# Altium PCB BaseMod_V2.PcbDoc (part 1 of 2)
Units mm, origin at the board's own origin, x right, y up, seen from the top; angles counter-clockwise.
Board outline 100 x 94 mm, 2 copper layers (Top Layer, Bottom Layer), stack 1.069 mm thick; 165 components, 135 nets, 648 pads, 250 vias.
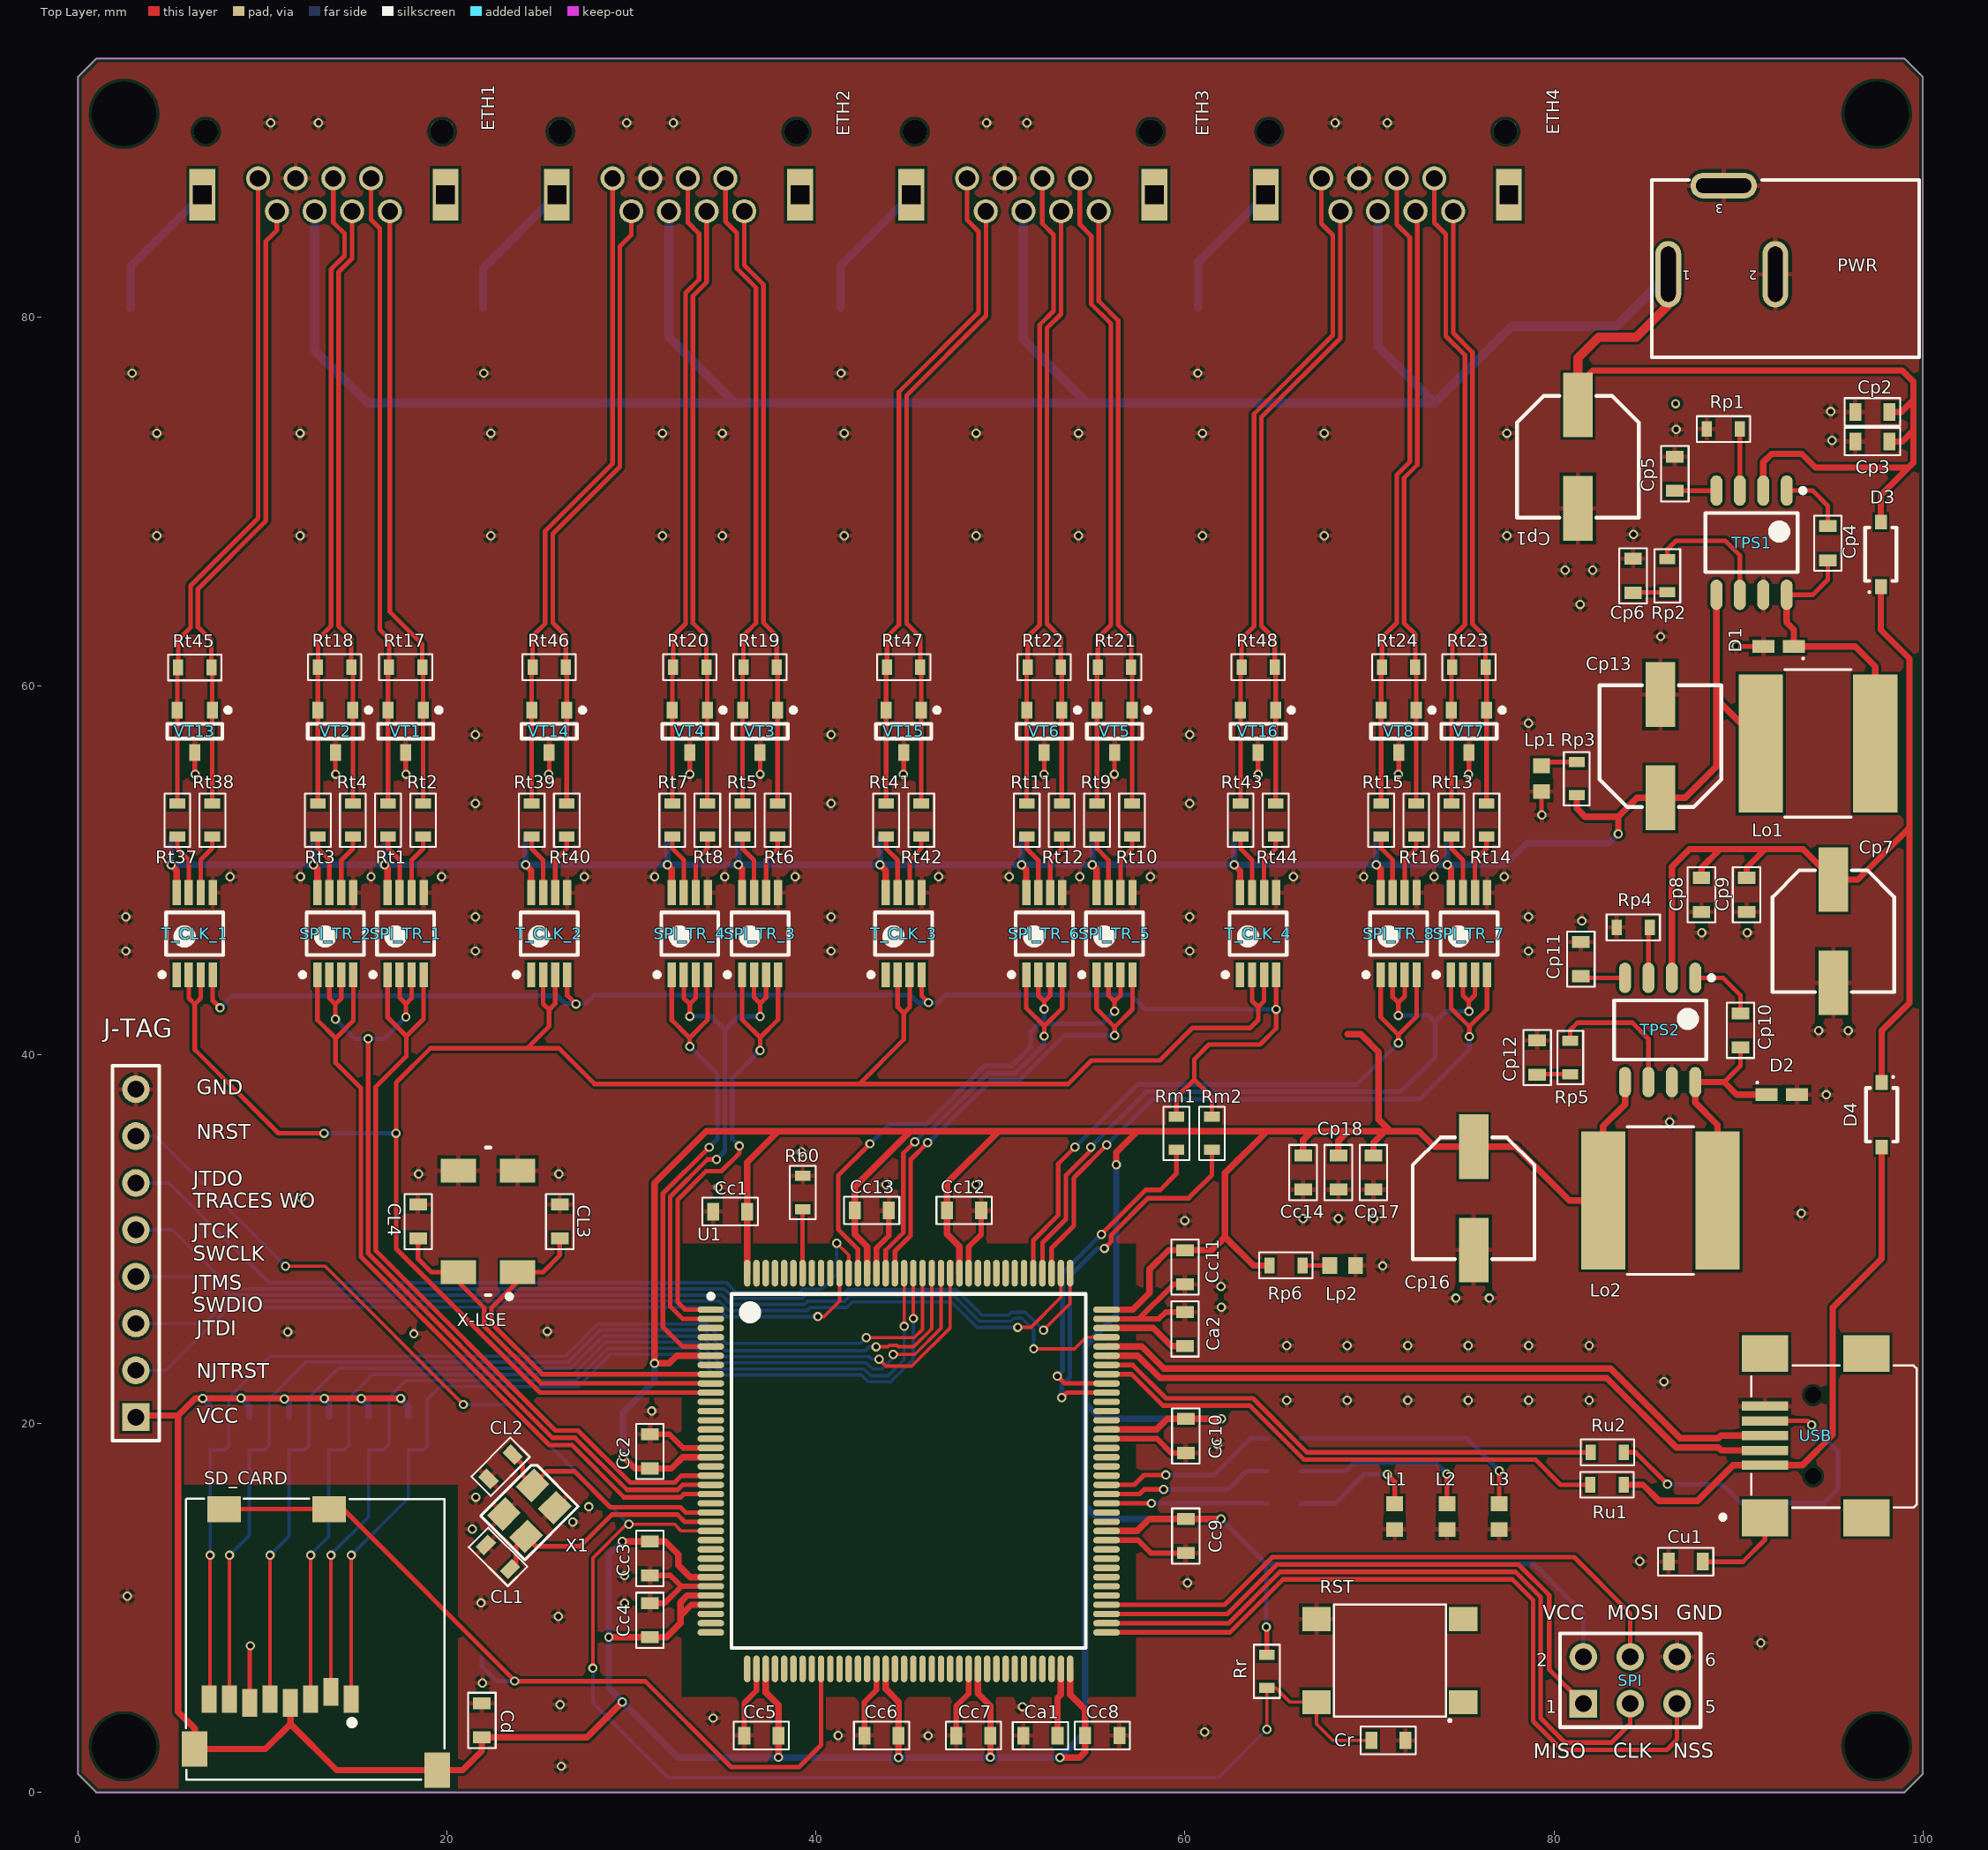
[diagram p0: Top Layer view]
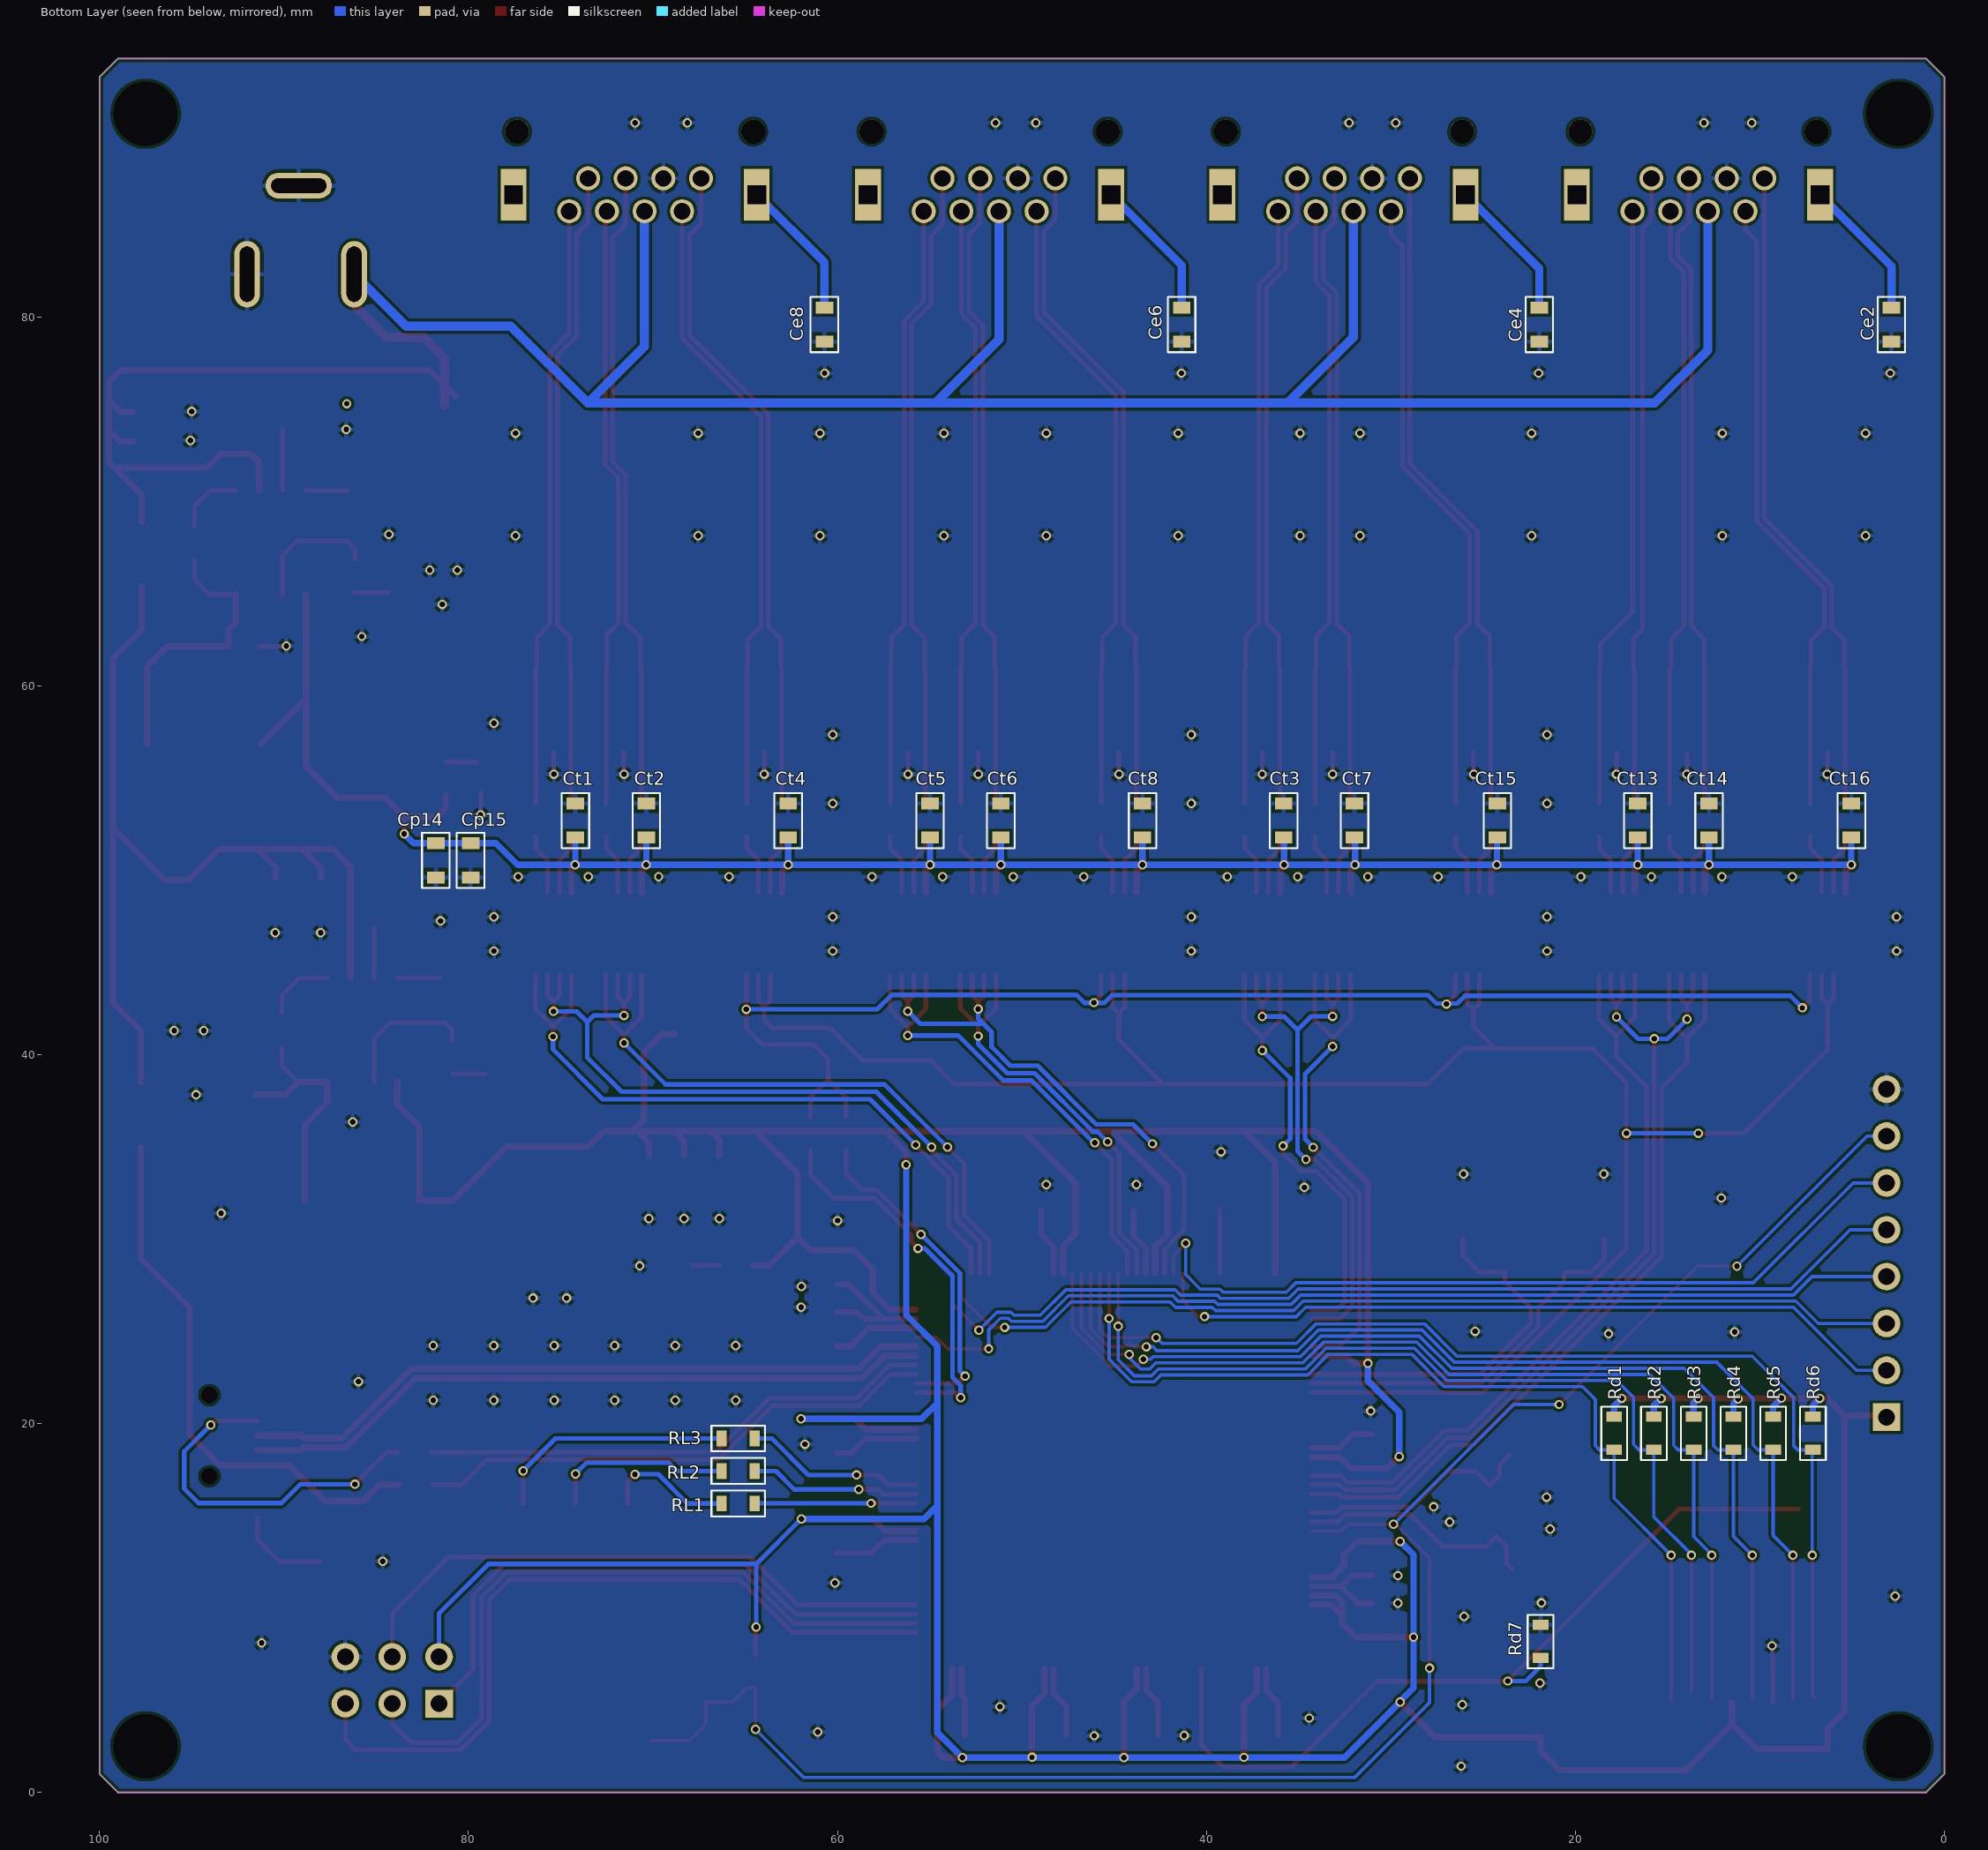
[diagram p1: Bottom Layer view, seen from below]

## Layer stack, top to bottom
Top Solder: solder mask 0.0102, Solder Resist, Dk 3.5
Top Layer: signal copper 0.0347
Dielectric 1: dielectric 1, FR-4, Dk 4.8
Bottom Layer: signal copper 0.0347
Bottom Solder: solder mask 0.0102, Solder Resist, Dk 3.5

## Board outline
0,1 0,93 1,94 99,94 100,93 100,1 99,0 1,0

## Design rules (kind name [scope] priority, off if disabled: settings)
Clearance [All] p1: gap=0.15
DiffPairsRouting [All] p1: maxlimit=0.5 minlimit=0.16 mostfreqgap=0.16 toplayer_minwidth=0.16 toplayer_maxwidth=1 toplayer_prefwidth=0.35 bottomlayer_minwidth=0.16 bottomlayer_maxwidth=1 bottomlayer_prefwidth=0.35 maxuncoupledlength=12.7
HoleSize [All] p1: absolutevalues=TRUE maxlimit=2308.557 minlimit=0.025 maxpercent=80.000 minpercent=20.000
HoleToHoleClearance [All] p1: gap=0.1 allowstackedmicrovias=TRUE
MinimumSolderMaskSliver [All] p1: minsoldermaskwidth=0.08
NetAntennae [All] p1: netantennaetolerance=10
PlaneClearance [All] p1: clearance=0.2
PlaneConnect [All] p1: planeconnectstyle=Relief reliefexpansion=0.3 reliefentries=4 reliefconductorwidth=0.25 reliefairgap=0.2
PolygonConnect [All] p1: connectstyle=Relief reliefconductorwidth=0.25 reliefentries=4 polygonreliefangle="90 Angle" airgapwidth=0.18
RoutingVias [All] p1: holewidth=0.3 width=0.5 viastyle="Through Hole" minholewidth=0.2 minwidth=0.4 maxholewidth=5 maxwidth=6
SilkToSilkClearance [All] p1: silktosilkclearance=0
SilkToSolderMaskClearance [IsPad] p1: minsilkscreentomaskgap=0.08 clearancetoexposedcopper=TRUE
SolderMaskExpansion [All] p1: expansion=0.102
Width J-TAG [InNet('NetJ-TAG_2') OR InNet('NetJ-TAG_3') OR InNet('NetJ-TAG_4') OR InNet('NetJ-TAG_5') OR InNet('NetJ-TAG_6') OR InNet('NetCr_2')] p1: maxlimit=0.4 minlimit=0.16 preferedwidth=0.18
Width SD_card [InNet('NetRd1_1')OR InNet('NetRd2_1')OR InNet('NetRd3_1')OR InNet('NetRd4_1')OR InNet('NetRd5_1')OR InNet('NetRd6_1')OR Innet('NetRd7_1')] p2: maxlimit=0.45 minlimit=0.16 preferedwidth=0.18
Width Power [InNet('V_CABLE') OR  InNet('VCC') OR InNet('VCC_RS') OR InNet('VCC_USB') OR InNet('NetCp7_1')] p3: maxlimit=0.5 minlimit=0.254 preferedwidth=0.35
Width [All] p4: maxlimit=0.45 minlimit=0.16 preferedwidth=0.25
21 further rules are at their usual default settings.

## Classes and differential pairs
component class USB: Cu1 Ru1 Ru2 USB
component class RS485_SPI_Recieve: Ct1 Ct2 Ct3 Ct4 Ct5 Ct6 Ct7 Ct8 Rt1 Rt2 Rt3 Rt4 Rt5 Rt6 Rt7 Rt8 Rt9 Rt10 Rt11 Rt12 Rt13 Rt14 Rt15 Rt16 Rt17 Rt18 Rt19 Rt20 Rt21 Rt22 Rt23 Rt24 SPI_TR_1 SPI_TR_2 SPI_TR_3 SPI_TR_4 SPI_TR_5 SPI_TR_6 SPI_TR_7 SPI_TR_8 VT1 VT2 VT3 VT4 VT5 VT6 VT7 VT8
component class RS485_Clock: Ct13 Ct14 Ct15 Ct16 Rt37 Rt38 Rt39 Rt40 Rt41 Rt42 Rt43 Rt44 Rt45 Rt46 Rt47 Rt48 T_CLK_1 T_CLK_2 T_CLK_3 T_CLK_4 VT13 VT14 VT15 VT16
component class programmer: J-TAG
component class Power: Cp1 Cp2 Cp3 Cp4 Cp5 Cp6 Cp7 Cp8 Cp9 Cp10 Cp11 Cp12 Cp13 Cp14 Cp15 Cp16 Cp17 Cp18 D1 D2 D3 D4 Lo1 Lo2 Lp1 Lp2 PWR Rp1 Rp2 Rp3 Rp4 Rp5 Rp6 TPS1 TPS2
component class MCU_Pins: CL3 CL4 Rm1 Rm2 U1 X-LSE
component class eth_conn: Ce2 Ce4 Ce6 Ce8 ETH1 ETH2 ETH3 ETH4
component class Core: Ca1 Ca2 Cc1 Cc2 Cc3 Cc4 Cc5 Cc6 Cc7 Cc8 Cc9 Cc10 Cc11 Cc12 Cc13 Cc14 CL1 CL2 Cr Rb0 Rr RST X1
component class AUX_conn: Cd L1 L2 L3 Rd1 Rd2 Rd3 Rd4 Rd5 Rd6 Rd7 RL1 RL2 RL3 SD_CARD SPI
differential pair D: +D_P -D_N

## Components (designator, comment, footprint, x,y, rotation, side; value= is the part's Value field where it differs from the comment)
Ca1 "X7R" CAP0603 52.17,3.077 r180 top
Ca2 "X7R" CAP0603 60.011,25.121 r90 top
Cc1 "Cap Semi" CAP0603 35.351,31.49 r0 top
Cc2 "Cap Semi" CAP0603 30.995,18.489 r270 top
Cc3 "Cap Semi" CAP0603 31.002,12.684 r90 top
Cc4 "Cap Semi" CAP0603 30.995,9.336 r270 top
Cc5 "Cap Semi" CAP0603 37.041,3.077 r0 top
Cc6 "Cap Semi" CAP0603 43.555,3.077 r0 top
Cc7 "Cap Semi" CAP0603 48.534,3.077 r0 top
Cc8 "Cap Semi" CAP0603 55.522,3.084 r180 top
Cc9 "Cap Semi" CAP0603 60.054,13.9 r90 top
Cc10 "Cap Semi" CAP0603 60.054,19.324 r90 top
Cc11 "Cap Semi" CAP0603 60.011,28.473 r90 top
Cc12 "Cap Semi" CAP0603 48.035,31.558 r180 top
Cc13 "Cap Semi" CAP0603 43.026,31.558 r180 top
Cc14 "X5R" CAP0603 66.408,33.605 r90 top
Cd "Cap Semi" CAP0603 21.889,3.908 r270 top
Ce2 "Cap Semi" CAP0603 2.873,79.575 r90 bottom
Ce4 "Cap Semi" CAP0603 21.96,79.575 r90 bottom
Ce6 "Cap Semi" CAP0603 41.344,79.575 r90 bottom
Ce8 "Cap Semi" CAP0603 60.707,79.575 r90 bottom
CL1 "Cap Semi" CAP0603 22.766,12.764 r315 top
CL2 "Cap Semi" CAP0603 22.909,17.652 r45 top
CL3 "Cap Semi" CAP0603 26.113,30.95 r270 top locked
CL4 "Cap Semi" CAP0603 18.438,30.95 r270 top locked
Cp1 "47uF" WCAP-ASLI_6.3x7.7 81.303,72.413 r90 top
Cp2 "Cap Semi" CAP0603 97.262,74.839 r0 top
Cp3 "Cap Semi" CAP0603 97.262,73.239 r0 top
Cp4 "Cap Semi" CAP0603 94.857,67.724 r90 top
Cp5 "Cap Semi" CAP0603 86.555,71.491 r270 top
Cp6 "Cap Semi" CAP0603 84.29,65.96 r270 top
Cp7 "47uF" WCAP-ASLI_6.3x7.7 95.152,46.69 r90 top
Cp8 "Cap Semi" CAP0603 88,48.658 r90 top
Cp9 "Cap Semi" CAP0603 90.45,48.658 r90 top
Cp10 "Cap Semi" CAP0603 90.122,41.312 r90 top
Cp11 "Cap Semi" CAP0603 81.459,45.177 r270 top
Cp12 "Cap Semi" CAP0603 79.095,39.841 r270 top
Cp13 "22uF" WCAP-ASNP_6.3x5.5 85.773,56.722 r270 top
Cp14 "Cap Semi" CAP0603 81.771,50.531 r90 bottom
Cp15 "Cap Semi" CAP0603 79.888,50.531 r90 bottom
Cp16 "22uF" WCAP-ASNP_6.3x5.5 75.65,32.207 r90 top
Cp17 "Cap Semi" CAP0603 70.222,33.605 r90 top
Cp18 "Cap Semi" CAP0603 68.324,33.605 r90 top
Cr "Cap Semi" CAP0603 71.027,2.82 r180 top
Ct1 "Cap Semi" CAP0603 74.21,52.688 r270 bottom
Ct2 "Cap Semi" CAP0603 70.365,52.688 r270 bottom
Ct3 "Cap Semi" CAP0603 35.819,52.688 r270 bottom
Ct4 "Cap Semi" CAP0603 62.676,52.688 r270 bottom
Ct5 "Cap Semi" CAP0603 54.989,52.688 r270 bottom
Ct6 "Cap Semi" CAP0603 51.149,52.688 r270 bottom
Ct7 "Cap Semi" CAP0603 31.977,52.688 r270 bottom
Ct8 "Cap Semi" CAP0603 43.47,52.688 r270 bottom
Ct13 "Cap Semi" CAP0603 16.624,52.688 r270 bottom
Ct14 "Cap Semi" CAP0603 12.765,52.688 r270 bottom
Ct15 "Cap Semi" CAP0603 24.236,52.688 r270 bottom
Ct16 "Cap Semi" CAP0603 5.046,52.688 r270 bottom
Cu1 "Cap Semi" CAP0603 87.146,12.509 r180 top
D1 "schottky Diode" DIOM1709X08N 92.184,62.123 r180 top
D2 "schottky Diode" DIOM1709X08N 92.349,37.837 r0 top
D3 "schottky_diode" MBR180S1 97.723,67.123 r90 top
D4 "schottky_diode" MBR180S1 97.767,36.739 r270 top
ETH1 "RJ48" "TE modular Jack RJ45" 13.334,86.612 r180 top locked
ETH2 "RJ48" "TE modular Jack RJ45" 32.546,86.612 r180 top locked
ETH3 "RJ48" "TE modular Jack RJ45" 51.759,86.612 r180 top locked
ETH4 "RJ48" "TE modular Jack RJ45" 70.971,86.612 r180 top locked
J-TAG "Header 8" HDR1X8 3.137,20.342 r90 top
L1 "LED2" 1608[0603] 71.374,14.955 r270 top
L2 "LED2" 1608[0603] 74.206,14.955 r270 top
L3 "LED2" 1608[0603] 77.037,14.955 r270 top
Lo1 "74404084150" WE-LQS_8040 94.321,56.87 r180 top
Lo2 "74404084150" WE-LQS_8040 85.773,32.088 r180 top
Lp1 "LED_1.6x0.8mm" 1608[0603] 79.325,54.957 r270 top
Lp2 "LED_1.6x0.8mm" 1608[0603] 68.553,28.568 r0 top
PWR "694108301002" 694108301002 99.802,82.31 r180 top
Rb0 "Res3" RES0603 39.281,32.524 r90 top
Rd1 "Res3" RES0603 17.905,19.472 r90 bottom
Rd2 "Res3" RES0603 15.75,19.472 r90 bottom
Rd3 "Res3" RES0603 13.596,19.472 r90 bottom
Rd4 "Res3" RES0603 11.441,19.472 r90 bottom
Rd5 "Res3" RES0603 9.287,19.472 r90 bottom
Rd6 "Res3" RES0603 7.132,19.472 r90 bottom
Rd7 "Res3" RES0603 21.889,8.184 r270 bottom
RL1 "Res3" RES0603 65.384,15.662 r0 bottom
RL2 "Res3" RES0603 65.384,17.423 r0 bottom
RL3 "Res3" RES0603 65.384,19.185 r0 bottom
Rm1 "Res3" RES0603 59.537,35.731 r90 top
Rm2 "Res3" RES0603 61.461,35.731 r90 top
Rp1 "Res3" RES0603 89.191,73.915 r0 top
Rp2 "Res3" RES0603 86.148,65.96 r90 top
Rp3 "Res3" RES0603 81.244,54.957 r270 top
Rp4 "Res3" RES0603 84.301,46.897 r0 top
Rp5 "Res3" RES0603 80.888,39.841 r90 top
Rp6 "Res3" RES0603 65.482,28.568 r180 top
Rr "Res3" RES0603 64.444,6.561 r90 top
RST "430152043826" 4301x20438x6 71.11,7.146 r180 top
Rt1 "p-p" RES0603 16.812,52.714 r270 top locked
Rt2 "p-p" RES0603 18.712,52.714 r270 top locked
Rt3 "p-p" RES0603 13.004,52.714 r270 top locked
Rt4 "p-p" RES0603 14.904,52.714 r270 top locked
Rt5 "p-p" RES0603 36.024,52.714 r270 top locked
Rt6 "p-p" RES0603 37.924,52.714 r270 top locked
Rt7 "p-p" RES0603 32.216,52.714 r270 top locked
Rt8 "p-p" RES0603 34.116,52.714 r270 top locked
Rt9 "p-p" RES0603 55.237,52.714 r270 top locked
Rt10 "p-p" RES0603 57.137,52.714 r270 top locked
Rt11 "p-p" RES0603 51.429,52.714 r270 top locked
Rt12 "p-p" RES0603 53.329,52.714 r270 top locked
Rt13 "p-p" RES0603 74.449,52.714 r270 top locked
Rt14 "p-p" RES0603 76.349,52.714 r270 top locked
Rt15 "p-p" RES0603 70.641,52.714 r270 top locked
Rt16 "p-p" RES0603 72.541,52.714 r270 top locked
Rt17 "pp" RES0603 17.762,60.999 r180 top locked
Rt18 "pp" RES0603 13.914,60.999 r180 top locked
Rt19 "pp" RES0603 36.974,60.999 r180 top locked
Rt20 "pp" RES0603 33.164,60.999 r180 top locked
Rt21 "pp" RES0603 56.187,60.999 r180 top locked
Rt22 "pp" RES0603 52.377,60.999 r180 top locked
Rt23 "pp" RES0603 75.399,60.999 r180 top locked
Rt24 "pp" RES0603 71.589,60.999 r180 top locked
Rt37 "p-p" RES0603 5.382,52.71 r90 top locked
Rt38 "p-p" RES0603 7.282,52.71 r90 top locked
Rt39 "p-p" RES0603 24.594,52.71 r90 top locked
Rt40 "p-p" RES0603 26.494,52.71 r90 top locked
Rt41 "p-p" RES0603 43.807,52.71 r90 top locked
Rt42 "p-p" RES0603 45.707,52.71 r90 top locked
Rt43 "p-p" RES0603 63.019,52.71 r90 top locked
Rt44 "p-p" RES0603 64.919,52.71 r90 top locked
Rt45 "p-p" RES0603 6.332,60.985 r180 top locked
Rt46 "p-p" RES0603 25.544,60.999 r180 top locked
Rt47 "p-p" RES0603 44.757,60.999 r180 top locked
Rt48 "p-p" RES0603 63.969,60.999 r180 top locked
Ru1 "Res3" RES0603 82.881,16.682 r0 top
Ru2 "Res3" RES0603 82.897,18.437 r0 top
SD_CARD "693071010811" 693071010811 12.9,8.282 r180 top locked
SPI "Header 3X2" HDR2X3 81.598,4.812 r0 top
SPI_TR_1 "sn65hvd7x" SOP127P600-8N 17.762,46.553 r90 top locked
SPI_TR_2 "sn65hvd7x" SOP127P600-8N 13.952,46.553 r90 top locked
SPI_TR_3 "sn65hvd7x" SOP127P600-8N 36.974,46.553 r90 top locked
SPI_TR_4 "sn65hvd7x" SOP127P600-8N 33.164,46.553 r90 top locked
SPI_TR_5 "sn65hvd7x" SOP127P600-8N 56.187,46.553 r90 top locked
SPI_TR_6 "sn65hvd7x" SOP127P600-8N 52.377,46.553 r90 top locked
SPI_TR_7 "sn65hvd7x" SOP127P600-8N 75.399,46.553 r90 top locked
SPI_TR_8 "sn65hvd7x" SOP127P600-8N 71.589,46.553 r90 top locked
T_CLK_1 "sn65hvd7x" SOP127P600-8N 6.332,46.553 r90 top locked
T_CLK_2 "sn65hvd7x" SOP127P600-8N 25.544,46.553 r90 top locked
T_CLK_3 "sn65hvd7x" SOP127P600-8N 44.757,46.553 r90 top locked
T_CLK_4 "sn65hvd7x" SOP127P600-8N 63.969,46.553 r90 top locked
TPS1 "TPS5403" SOIC127P600X175-8M 90.715,67.754 r270 top
TPS2 "TPS5403" SOIC127P600X175-8M 85.76,41.336 r270 top
U1 "STM32F767ZIT" TSQFP50P2200X2200X160-144N 45.029,17.424 r0 top locked
USB "65100516121" 65100516121 94.047,19.341 r90 top
VT1 "CDSOT23-SM712" SOT190P230X117-3N 17.762,57.525 r270 top
VT2 "CDSOT23-SM712" SOT190P230X117-3N 13.952,57.525 r270 top
VT3 "CDSOT23-SM712" SOT190P230X117-3N 36.974,57.525 r270 top locked
VT4 "CDSOT23-SM712" SOT190P230X117-3N 33.164,57.525 r270 top locked
VT5 "CDSOT23-SM712" SOT190P230X117-3N 56.187,57.525 r270 top locked
VT6 "CDSOT23-SM712" SOT190P230X117-3N 52.377,57.525 r270 top locked
VT7 "CDSOT23-SM712" SOT190P230X117-3N 75.399,57.525 r270 top locked
VT8 "CDSOT23-SM712" SOT190P230X117-3N 71.589,57.525 r270 top locked
VT13 "CDSOT23-SM712" SOT190P230X117-3N 6.332,57.525 r270 top
VT14 "CDSOT23-SM712" SOT190P230X117-3N 25.544,57.525 r270 top locked
VT15 "CDSOT23-SM712" SOT190P230X117-3N 44.757,57.525 r270 top locked
VT16 "CDSOT23-SM712" SOT190P230X117-3N 63.969,57.525 r270 top locked
X1 "Resonator" ABM8G 24.468,15.26 r225 top
X-LSE "Resonator" SOJ550P380X250-4M 22.226,30.959 r180 top locked

## Footprints (in the part's own frame and the unit in brackets; to place one, negate y for a bottom-side part, rotate by r counter-clockwise, add the part's x,y. Pads: shape width x height; smd on the part's side, far side on the other; paste and mask are expansions set on the pad)
1608[0603] [mm] "Chip Capacitor, Body 1.6x0.8mm, IPC High Density"
  rect 0.8x0.9 smd: 1(-0.7,0) 2(0.7,0)
  body extent -0.87,-0.48 0.87,0.48, height 1.3
4301x20438x6 [mm] "6*6mm vertical type, SMD, height 4.3mm, black actuator, 160gf, T&R"
  rect 1.55x1.3 smd: 1(-3.975,2.25) 2(-3.975,-2.25) 3(3.975,2.25) 4(3.975,-2.25)
  silkscreen extent -3.29,-3.04 3.04,3.29, body extent -4.5,-3.1 4.5,3.1, height 4.29
65100516121 [mm] "5 pins"
  rect 0.5x2.5 smd: 1(-1.6,2.6) 2(-0.8,2.6) 3(0,2.6) 4(0.8,2.6) 5(1.6,2.6)
  rect 2x2.5 smd: Shell(-4.45,-2.9) Shell(-4.45,2.6) Shell(4.45,-2.9) Shell(4.45,2.6)
  round 0.7 hole 0.9 unplated: ""(-2.2,0) ""(2.2,0)
  silkscreen extent -4.54,-5.63 3.8,5.01, body extent -4.8,-5.9 4.8,3.35, height 3.9
693071010811 [mm] "WR-CRD Micro SD_Push and Push_Card Detection_8 pins"
  rect 0.8x1.5 smd: 1(-1.915,3.225) 2(-0.815,2.825) 3(0.285,3.225) 4(1.385,3.425) 5(2.485,3.225) 6(3.585,3.425) 7(4.685,3.225) 8(5.785,3.225)
  rect 1.4x1.9 smd: 9(-6.575,7.075) 9(6.575,5.925)
  rect 1.8x1.4 smd: 10(-0.715,-7.075) 10(4.975,-7.075)
  silkscreen extent -6.98,-7.65 7.05,7.59, body extent -6.97,-7.63 7.03,7.58, height 1.84
694108301002 [mm] "WR-DC_DC Power Jack_Right Angled_THT Center Pin ?2.5_Plug ID ?2.05_Plug OD ?5.5"
  oval 1.4x3.6 hole 0.8 slot 3 at 90 deg: 1(13.6,0) 2(7.8,0)
  oval 3.6x1.4 hole 0.8 slot 3 at 0 deg: 3(10.6,-4.8)
  silkscreen extent 0,-5.1 14.5,4.5, body extent 0,-4.95 14.5,4.55, height 10.85
ABM8G [mm] "resonator"
  rect 1.4x1.2 smd: 1(-1.1,-0.85) 2(1.1,-0.85) 3(1.1,0.85) 4(-1.1,0.85)
  silkscreen extent -2.05,-1.68 2.05,1.7, body extent -1.62,-1.2 1.63,1.3, height 1
CAP0603 [mm]
  rect 0.65x0.95 smd: 1(-0.925,0) 2(0.925,0)
  silkscreen extent -1.5,-0.74 1.5,0.75, body extent -0.8,-0.4 0.8,0.4, height 0.2
DIOM1709X08N [mm] "Molded Diode, 2-Leads, Body 1.70x0.90mm, IPC Medium Density"
  rect 1.2x0.7 smd: 1(-0.825,0) 2(0.825,0)
  silkscreen extent -1.37,0.6 -1.28,0.7, body extent -0.9,-0.5 0.9,0.5, height 0.85
HDR1X8 [mm] "Connector; Header; 8 Position"
  rect 1.5x1.5 hole 0.9: 1(0,0)
  round 1.5 hole 0.9: 2(2.54,0) 3(5.08,0) 4(7.62,0) 5(10.16,0) 6(12.7,0) 7(15.24,0) 8(17.78,0)
  silkscreen extent -1.27,-1.27 19.05,1.27
HDR2X3 [mm] "Connector; Header; 3x2 Position"
  rect 1.5x1.5 hole 0.9: 1(0,0)
  round 1.5 hole 0.9: 2(0,2.54) 3(2.54,0) 4(2.54,2.54) 5(5.08,0) 6(5.08,2.54)
  silkscreen extent -1.27,-1.27 6.35,3.81
MBR180S1 [mm] "SODFL, 2-Leads, Body 1.55x3.70mm, IPC Medium Density"
  rect 0.8x0.65 smd: 1(-1.75,0) 2(1.75,0)
  silkscreen extent -2.1,-0.85 1.45,0.85, body extent -1.42,-0.85 1.43,0.85, height 1.35
RES0603 [mm]
  rect 0.55x0.85 smd: 1(-0.9,0) 2(0.9,0)
  silkscreen extent -1.45,-0.7 1.45,0.7, body extent -0.8,-0.4 0.8,0.4, height 0.2
SOIC127P600X175-8M [mm] "SOIC, 8-Leads, Body 4.90x3.90mm, Pitch 1.27mm, IPC Low Density"
  oval 1.65x0.65 smd: 1(-2.825,1.905) 2(-2.825,0.635) 3(-2.825,-0.635) 4(-2.825,-1.905) 5(2.825,-1.905) 6(2.825,-0.635) 7(2.825,0.635) 8(2.825,1.905)
  silkscreen extent -2.95,-2.5 1.6,2.91, body extent -2,-2.5 2,2.5, height 1.75
SOJ550P380X250-4M [mm] "SOJ, 4-Leads, Body 8.00x3.75mm, Pitch 5.50mm, IPC Low Density"
  rect 1.9x1.3 smd: 1(-1.6,2.75) 2(-1.6,-2.75) 3(1.6,2.75) 4(1.6,-2.75)
  silkscreen extent -1.28,-4 0.13,4.2, body extent -1.9,-4 1.9,4, height 2.5
SOP127P600-8N [mm]
  rect 1.35x0.45 smd: 1(-2.225,0.975) 2(-2.225,0.325) 3(-2.225,-0.325) 4(-2.225,-0.975) 5(2.225,-0.975) 6(2.225,-0.325) 7(2.225,0.325) 8(2.225,0.975)
  silkscreen extent -2.35,-1.55 1.15,1.9, body extent -1.55,-1.55 1.55,1.55, height 1.1
SOT190P230X117-3N [mm] "SOT223, 3-Leads, Body 2.90x2.30mm (avg), Pitch 1.90mm, IPC Medium Density"
  rect 0.9x0.6 smd: 1(-1.15,0.95) 2(-1.15,-0.95) 3(1.15,0)
  silkscreen extent -1.27,-1.5 0.4,1.93, body extent -0.7,-1.5 0.7,1.5, height 1.17
"TE modular Jack RJ45" [mm] "ethernet connector"
  round 1.3 hole 0.9: 1(3.57,-0.89) 2(2.55,0.89) 3(1.53,-0.89) 4(0.51,0.89) 5(-0.51,-0.89) 6(-1.53,0.89) 7(-2.55,-0.89) 8(-3.57,0.89)
  rect 1.4x2.8 hole 1 square: 9(-6.59,0) 9(6.59,0)
  round 1.3 hole 1.31 unplated: ""(-6.4,-3.43) ""(6.4,-3.43)
  body extent -8.1,-6 8.1,9, height 11.3
TSQFP50P2200X2200X160-144N [mm] "TSQFP, 144-Leads, Body 20.00x20.00mm, Pitch 0.50mm, IPC Medium Density"
  oval 1.45x0.35 smd: 1(-10.725,8.75) 2(-10.725,8.25) 3(-10.725,7.75) 4(-10.725,7.25) 5(-10.725,6.75) 6(-10.725,6.25) 7(-10.725,5.75) 8(-10.725,5.25) 9(-10.725,4.75) 10(-10.725,4.25) 11(-10.725,3.75) 12(-10.725,3.25) 13(-10.725,2.75) 14(-10.725,2.25) 15(-10.725,1.75) 16(-10.725,1.25) 17(-10.725,0.75) 18(-10.725,0.25) 19(-10.725,-0.25) 20(-10.725,-0.75) 21(-10.725,-1.25) 22(-10.725,-1.75) 23(-10.725,-2.25) 24(-10.725,-2.75) 25(-10.725,-3.25) 26(-10.725,-3.75) 27(-10.725,-4.25) 28(-10.725,-4.75) 29(-10.725,-5.25) 30(-10.725,-5.75) 31(-10.725,-6.25) 32(-10.725,-6.75) 33(-10.725,-7.25) 34(-10.725,-7.75) 35(-10.725,-8.25) 36(-10.725,-8.75) 73(10.725,-8.75) 74(10.725,-8.25) 75(10.725,-7.75) 76(10.725,-7.25) 77(10.725,-6.75) 78(10.725,-6.25) 79(10.725,-5.75) 80(10.725,-5.25) 81(10.725,-4.75) 82(10.725,-4.25) 83(10.725,-3.75) 84(10.725,-3.25) 85(10.725,-2.75) 86(10.725,-2.25) 87(10.725,-1.75) 88(10.725,-1.25) 89(10.725,-0.75) 90(10.725,-0.25) 91(10.725,0.25) 92(10.725,0.75) 93(10.725,1.25) 94(10.725,1.75) 95(10.725,2.25) 96(10.725,2.75) 97(10.725,3.25) 98(10.725,3.75) 99(10.725,4.25) 100(10.725,4.75) 101(10.725,5.25) 102(10.725,5.75) 103(10.725,6.25) 104(10.725,6.75) 105(10.725,7.25) 106(10.725,7.75) 107(10.725,8.25) 108(10.725,8.75)
  oval 0.35x1.45 smd: 37(-8.75,-10.725) 38(-8.25,-10.725) 39(-7.75,-10.725) 40(-7.25,-10.725) 41(-6.75,-10.725) 42(-6.25,-10.725) 43(-5.75,-10.725) 44(-5.25,-10.725) 45(-4.75,-10.725) 46(-4.25,-10.725) 47(-3.75,-10.725) 48(-3.25,-10.725) 49(-2.75,-10.725) 50(-2.25,-10.725) 51(-1.75,-10.725) 52(-1.25,-10.725) 53(-0.75,-10.725) 54(-0.25,-10.725) 55(0.25,-10.725) 56(0.75,-10.725) 57(1.25,-10.725) 58(1.75,-10.725) 59(2.25,-10.725) 60(2.75,-10.725) 61(3.25,-10.725) 62(3.75,-10.725) 63(4.25,-10.725) 64(4.75,-10.725) 65(5.25,-10.725) 66(5.75,-10.725) 67(6.25,-10.725) 68(6.75,-10.725) 69(7.25,-10.725) 70(7.75,-10.725) 71(8.25,-10.725) 72(8.75,-10.725) 109(8.75,10.725) 110(8.25,10.725) 111(7.75,10.725) 112(7.25,10.725) 113(6.75,10.725) 114(6.25,10.725) 115(5.75,10.725) 116(5.25,10.725) 117(4.75,10.725) 118(4.25,10.725) 119(3.75,10.725) 120(3.25,10.725) 121(2.75,10.725) 122(2.25,10.725) 123(1.75,10.725) 124(1.25,10.725) 125(0.75,10.725) 126(0.25,10.725) 127(-0.25,10.725) 128(-0.75,10.725) 129(-1.25,10.725) 130(-1.75,10.725) 131(-2.25,10.725) 132(-2.75,10.725) 133(-3.25,10.725) 134(-3.75,10.725) 135(-4.25,10.725) 136(-4.75,10.725) 137(-5.25,10.725) 138(-5.75,10.725) 139(-6.25,10.725) 140(-6.75,10.725) 141(-7.25,10.725) 142(-7.75,10.725) 143(-8.25,10.725) 144(-8.75,10.725)
  silkscreen extent -10.85,-9.6 9.6,9.6, body extent -10,-10 10,10, height 1.6
WCAP-ASLI_6.3x7.7 [mm] "Polarized capacitors, Aluminum Electrolytic Capacitors, 2-Leads, Body 6.3x7.7x2.2"
  rect 3.5x1.6 smd: 1(2.8,0) 2(-2.8,0)
  silkscreen extent -3.3,-3.3 3.3,3.3, body extent -3.65,-3.3 3.65,3.3, height 7.7
WCAP-ASNP_6.3x5.5 [mm] "Unpolarized capacitors, Aluminum Electrolytic Capacitors, 2-Leads, Body 6.3x5.5x2.2"
  rect 3.5x1.6 smd: 1(-2.8,0) 2(2.8,0)
  silkscreen extent -3.3,-3.3 3.3,3.3, body extent -3.65,-3.3 3.65,3.3, height 5.5
WE-LQS_8040 [mm] "SMD Power Inductor, 2-Leads, body 8.0x8.0mm"
  rect 2.4x7.5 smd: 1(-3.1,0) 2(3.1,0)
  silkscreen extent -1.8,-4 1.8,4, body extent -4,-4 4,4, height 4.25

## Part data
Ca1 Ca2 Cc14: library part "Cap Semi", "Capacitor (Semiconductor SIM Model)"
Cc1 Cc2 Cc3 Cc4 Cc5 Cc6 Cc7 Cc8 Cc9 Cc10 Cc11 Cc12 Cc13 Cd Ce2 Ce4 Ce6 Ce8 CL1 CL2 CL3 CL4 Cp2 Cp3 Cp4 Cp5 Cp6 Cp8 Cp9 Cp10 Cp11 Cp12 Cp14 Cp15 Cp17 Cp18 Cr Ct1 Ct2 Ct3 Ct4 Ct5 Ct6 Ct7 Ct8 Ct13 Ct14 Ct15 Ct16 Cu1: "Capacitor (Semiconductor SIM Model)"
Cp1 Cp7: library part "WCAP-ASLI, 865080645012", "WCAP-ASLI Aluminum Electrolytic Capacitors, 47uF"
Cp13 Cp16: library part "WCAP-ASNP, 865250543005", "WCAP-ASNP Aluminum Electrolytic Capacitors, 22uF"
D1 D2: library part SMD_schottky_CDBU0130L
D3 D4: library part "MRB180S1 schottky"
ETH1 ETH2 ETH3 ETH4: library part "Ethernet Jack"
J-TAG: "Header, 8-Pin"
L1 L2 L3: "Typical RED, GREEN, YELLOW, AMBER GaAs LED"
Lo1 Lo2: "WE-LQS SMD Power Inductor, size 8040, 15 uH"
PWR: "WR-DC DC Power Jack Right Angled(6.4)"
Rb0 Rd1 Rd2 Rd3 Rd4 Rd5 Rd6 Rd7 RL1 RL2 RL3 Rm1 Rm2 Rp1 Rp2 Rp3 Rp4 Rp5 Rp6 Rr Ru1 Ru2: "Resistor"
RST: library part "WS-TASV, 430152043826", "WS-TASV 6x6 mm SMD"
Rt1 Rt2 Rt3 Rt4 Rt5 Rt6 Rt7 Rt8 Rt9 Rt10 Rt11 Rt12 Rt13 Rt14 Rt15 Rt16 Rt17 Rt18 Rt19 Rt20 Rt21 Rt22 Rt23 Rt24 Rt37 Rt38 Rt39 Rt40 Rt41 Rt42 Rt43 Rt44 Rt45 Rt46 Rt47 Rt48: library part Res3, "Resistor"
SD_CARD: "WR-CRD Micro SD Card Connector Push & Push - 8 pins"
SPI: "Header, 3-Pin, Dual row"
TPS1 TPS2: "switching power-3.3V"
USB: "WR-COM Mini USB 2.0 Type B SMT Horizontal 5 Contacts"
X1 X-LSE: library part ABM8G-MHz

## Free pads (board coordinates)
  round 0 hole 3.5 unplated: 1(97.5,2.5) 2(2.5,2.5) 3(2.5,91) 4(97.5,91)

## Via types
v1: diameter 0.5, hole 0.3, Top Layer to Bottom Layer, tented both sides, 250 vias

## Nets (pads, with @x,y where several pads share a name; then routed paths per layer and width w, separated by ;. In a path a pad name is that pad's centre, name@x,y a point inside that pad or via, vN(x,y) a via of type N, cw(c..) or ccw(c..) an arc to the next point about the centre after c; other vN are vias at no path point)
D_N: U1.103 USB.2 | length 37.8
  Top Layer w0.35: U1.103@55.754,23.674 57.442,23.674 58.652,22.464 82.865,22.464 86.637,18.692 88.917,18.692 89.068,18.541 USB.2@91.447,18.541
D_P: U1.104 USB.3 | length 37.8
  Top Layer w0.35: U1.104@55.754,24.174 57.663,24.174 58.863,22.974 83.076,22.974 86.849,19.201 88.919,19.201 89.059,19.341 USB.3@91.447,19.341
GND: Ca1.2 Ca2.2 Cc1.1 Cc2.1 Cc3.1 Cc4.1 Cc5.1 Cc6.1 Cc7.1 Cc8.1 Cc9.1 Cc10.1 Cc11.1 Cc12.1 Cc13.1 Cc14.1 Cd.1 Ce2.1 Ce4.1 Ce6.1 Ce8.1 CL1.1 CL2.1 CL3.1 CL4.1 Cp1.2 Cp2.1 Cp3.1 Cp5.1 Cp6.1 Cp7.2 Cp8.1 Cp9.1 Cp11.1 Cp12.1 Cp13.1 Cp14.1 Cp15.1 Cp16.1 Cp17.1 Cp18.1 Cr.1 Ct1.1 Ct2.1 Ct3.1 Ct4.1 Ct5.1 Ct6.1 Ct7.1 Ct8.1 Ct13.1 Ct14.1 Ct15.1 Ct16.1 Cu1.2 D1.2 D2.2 ETH1.3 ETH2.3 ETH3.3 ETH4.3 J-TAG.8 L1.2 L2.2 L3.2 Lp1.2 Lp2.2 PWR.2 PWR.3 Rb0.2 Rd7.1 Rp1.1 Rp4.1 RST.4 SD_CARD.6 SPI.6 SPI_TR_1.5 SPI_TR_2.5 SPI_TR_3.5 SPI_TR_4.5 SPI_TR_5.5 SPI_TR_6.5 SPI_TR_7.5 SPI_TR_8.5 T_CLK_1.5 T_CLK_2.5 T_CLK_3.5 T_CLK_4.5 TPS1.7 TPS2.7 U1.16 U1.31 U1.38 U1.51 U1.61 U1.83 U1.94 U1.107 U1.120 U1.130 USB.5 VT1.3 VT2.3 VT3.3 VT4.3 VT5.3 VT6.3 VT7.3 VT8.3 VT13.3 VT14.3 VT15.3 VT16.3 X1.2 X1.4 X-LSE.2 X-LSE.4 | length 64.9
  Top Layer w0.25: v1@6.332,55.221 VT13.3@6.332,56.375 ; SD_CARD.6@9.315,4.857 v1@9.315,7.921 ; v1@13.952,55.218 VT2.3@13.952,56.375 ; v1@17.762,55.216 VT1.3@17.762,56.375 ; v1@25.544,55.229 VT14.3@25.544,56.375 ; v1@33.164,55.206 VT4.3@33.164,56.375 ; v1@36.974,55.205 VT3.3@36.974,56.375 ; v1@44.757,55.213 VT15.3@44.757,56.375 ; v1@52.377,55.21 VT6.3@52.377,56.375 ; v1@56.187,55.208 VT5.3@56.187,56.375 ; v1@63.969,55.204 VT16.3@63.969,56.375 ; v1@71.589,55.213 VT8.3@71.589,56.375 ; v1@75.399,55.221 VT7.3@75.399,56.375 ; v1@79.325,53.012 Lp1.2@79.325,54.257 ; v1@89.907,62.123 D1.2@91.359,62.123
  Top Layer w0.3: Cc4.1@30.995,10.261 31.789,10.261 32.702,11.174 ; Cc2.1@30.995,19.414 32.068,19.414 32.808,18.674 U1.16@34.304,18.674 ; Cc3.1@31.002,11.759 32.117,11.759 32.702,11.174 ; U1.31@34.304,11.174 32.702,11.174 ; Cc5.1@36.116,3.077 36.116,4.852 36.779,5.515 U1.38@36.779,6.699 ; Cc6.1@42.63,3.077 42.63,4.896 43.279,5.545 U1.51@43.279,6.699 ; U1.130@43.279,28.149 43.279,29.508 43.951,30.18 Cc13.1@43.951,31.558 ; Cc7.1@47.609,3.077 47.609,4.677 48.279,5.347 U1.61@48.279,6.699 ; U1.120@48.279,28.149 48.279,29.573 48.96,30.254 Cc12.1@48.96,31.558 ; U1.83@55.754,13.674 57.452,13.674 58.151,12.975 Cc9.1@60.054,12.975 ; U1.94@55.754,19.174 58.485,19.174 59.26,18.399 Cc10.1@60.054,18.399 ; U1.107@55.754,25.674 57.514,25.674 ; Ca2.2@60.011,26.046 58.963,26.046 58.591,25.674 57.514,25.674 ; Cc11.1@60.011,27.548 59.388,27.548 57.514,25.674
  other v1: 26.198,1.422 41.209,3.086 46.087,3.071 61.071,3.28 34.436,4.029 51.198,4.645 26.133,4.754 21.926,5.928 9.344,7.95 91.216,8.103 26.036,9.543 21.843,10.273 29.626,10.253 2.676,10.643 60.133,11.353 29.626,11.752 84.654,12.524 21.372,14.279 26.82,14.662 27.687,15.487 21.566,16.007 61.769,18.877 31.098,20.677 65.523,21.261 68.801,21.261 72.079,21.261 75.357,21.261 78.635,21.261 81.913,21.261 85.962,22.271 65.523,24.221 68.801,24.221 72.079,24.221 75.357,24.221 78.635,24.221 81.913,24.221 18.206,24.861 11.369,24.967 25.436,24.997 61.973,26.298 74.688,26.798 76.506,26.798 61.954,27.424 70.722,28.545 60,31 66.406,31.115 68.314,31.115 70.223,31.115 93.412,31.401 12.091,32.223 34.7,32.8 43.797,32.953 48.687,32.953 18.466,33.527 26.07,33.527 39.208,34.732 86.281,36.345 94.77,37.823 94.353,41.303 95.953,41.303 2.591,45.615 21.548,45.615 40.824,45.615 60.262,45.615 78.626,45.615 88.015,46.609 90.477,46.609 81.52,47.243 2.591,47.474 21.548,47.474 40.824,47.474 60.262,47.474 78.626,47.474 8.24,49.646 12.063,49.646 15.885,49.646 19.708,49.646 27.452,49.646 31.258,49.646 35.063,49.646 38.869,49.646 46.656,49.646 50.48,49.646 54.303,49.646 58.127,49.646 65.883,49.646 69.694,49.646 73.504,49.646 77.315,49.646 79.35,52.987 21.548,53.617 40.824,53.617 60.262,53.617 6.353,55.2 13.97,55.2 17.778,55.2 25.515,55.2 33.158,55.2 36.979,55.2 44.744,55.2 52.367,55.2 56.179,55.2 63.973,55.2 71.576,55.2 75.378,55.2 21.548,57.343 40.824,57.343 60.262,57.343 78.626,57.962 89.877,62.153 85.787,62.666 81.424,64.408 80.616,66.27 82.105,66.27 4.281,68.128 12.039,68.128 22.382,68.128 31.68,68.128 34.926,68.128 41.528,68.128 48.68,68.128 54.236,68.128 60.948,68.128 67.55,68.128 77.453,68.128 84.313,68.199 95.072,73.298 4.281,73.685 12.039,73.685 22.382,73.685 31.68,73.685 34.926,73.685 41.528,73.685 48.68,73.685 54.236,73.685 60.948,73.685 67.55,73.685 77.453,73.685 86.629,73.898 95.011,74.864 2.936,76.942 21.992,76.942 41.36,76.942 60.699,76.942 10.443,90.508 13.039,90.508 29.743,90.508 32.271,90.508 49.249,90.508 51.436,90.508 68.14,90.508 70.976,90.508
NetCa1_1: Ca1.1 U1.71 | length 3.7
  Top Layer w0.35: Ca1.1@53.095,3.077 53.095,5.118 53.279,5.302 U1.71@53.279,6.699
NetCa2_1: Ca2.1 U1.106 | length 4.7
  Top Layer w0.35: U1.106@55.754,25.174 58.288,25.174 59.266,24.196 Ca2.1@60.011,24.196
NetCe2_2: Ce2.2 ETH1.9@6.744,86.612 | length 7.7
  Bottom Layer w0.45: Ce2.2@2.873,80.5 2.873,82.741 ETH1.9@6.744,86.612
NetCe4_2: Ce4.2 ETH2.9@25.956,86.612 | length 7.8
  Bottom Layer w0.45: Ce4.2@21.96,80.5 21.96,82.616 ETH2.9@25.956,86.612
NetCe6_2: Ce6.2 ETH3.9@45.169,86.612 | length 7.7
  Bottom Layer w0.45: Ce6.2@41.344,80.5 41.344,82.787 ETH3.9@45.169,86.612
NetCe8_2: Ce8.2 ETH4.9@64.381,86.612 | length 7.6
  Bottom Layer w0.45: Ce8.2@60.707,80.5 60.707,82.938 ETH4.9@64.381,86.612
NetCL1_2: CL1.2 U1.24 X1.3 | length 13.2
  Top Layer w0.25: CL1.2@23.42,12.11 23.738,12.428 23.738,13.328 X1.3@24.291,13.881 24.834,13.338 27.212,13.338 28.939,15.065 32.495,15.065 32.886,14.674 U1.24@34.304,14.674
NetCL2_2: CL2.2 U1.23 X1.1 | length 13
  Top Layer w0.25: CL2.2@23.563,18.306 24.114,17.755 24.114,17.17 X1.1@24.645,16.639 25.413,17.407 26.904,17.407 28.846,15.465 32.661,15.465 32.952,15.174 U1.23@34.304,15.174
NetCL3_2: CL3.2 U1.8 X-LSE.1 | length 20
  Top Layer w0.25: CL3.2@26.113,30.025 26.113,29.117 25.205,28.209 X-LSE.1@23.826,28.209 23.826,27.671 22.421,26.266 22.421,25.429 25.176,22.674 U1.8@34.304,22.674
NetCL4_2: CL4.2 U1.9 X-LSE.3 | length 20.7
  Top Layer w0.25: CL4.2@18.438,30.025 18.438,28.924 19.153,28.209 X-LSE.3@20.626,28.209 20.626,27.669 22.021,26.274 22.021,25.263 25.11,22.174 U1.9@34.304,22.174
NetCp4_1: Cp4.1 D1.1 Lo1.1 TPS1.8 | length 15.6
  Top Layer w0.25: TPS1.8@92.62,64.929 94.032,64.929 94.857,65.754 Cp4.1@94.857,66.799
  Top Layer w0.35: TPS1.8@92.62,64.929 92.62,63.427 93.009,63.038 D1.1@93.009,62.123 96.333,62.123 97.421,61.035 Lo1.1@97.421,56.87
NetCp4_2: Cp4.2 TPS1.1 | length 3.7
  Top Layer w0.25: TPS1.1@92.62,70.579 94.025,70.579 94.857,69.747 Cp4.2@94.857,68.649
NetCp5_2: Cp5.2 TPS1.4 | length 2.2
  Top Layer w0.25: Cp5.2@86.555,70.566 TPS1.4@88.797,70.566
NetCp6_2: Cp6.2 Rp2.1 | length 1.8
  Top Layer w0.25: Cp6.2@84.315,65.06 Rp2.1@86.148,65.06
NetCp7_1: Cp7.1 Cp8.2 Cp9.2 D3.1 D4.1 TPS2.2 | length 53.2
  Top Layer w0.35: TPS2.2@86.395,44.161 86.395,50.181 87.35,51.136 89.019,51.136 ; Cp8.2@88,49.583 88,50.117 89.019,51.136 ; Cp9.2@90.45,49.583 90.45,50.135 91.451,51.136 ; D3.1@97.723,65.373 97.723,63.026 99.277,61.472 99.277,52.292 ; D4.1@97.767,38.489 97.767,41.297 99.277,42.807 99.277,52.292 ; 89.019,51.136 91.451,51.136 ; 91.451,51.136 93.506,51.136 Cp7.1@95.152,49.49 96.475,49.49 99.277,52.292
NetCp10_1: Cp10.1 D2.1 Lo2.1 TPS2.8 | length 13.3
  Top Layer w0.25: 89.23,38.511 90.122,39.403 Cp10.1@90.122,40.387
  Top Layer w0.35: Lo2.1@88.873,32.088 88.873,36.186 87.665,37.394 TPS2.8@87.665,38.511 89.23,38.511 89.904,37.837 D2.1@91.524,37.837
NetCp10_2: Cp10.2 TPS2.1 | length 3.8
  Top Layer w0.25: TPS2.1@87.665,44.161 89.17,44.161 90.122,43.209 Cp10.2@90.122,42.237
NetCp11_2: Cp11.2 TPS2.4 | length 2.3
  Top Layer w0.25: Cp11.2@81.55,44.161 TPS2.4@83.855,44.161
NetCp12_2: Cp12.2 Rp5.1 | length 1.8
  Top Layer w0.25: Cp12.2@79.095,38.916 79.12,38.941 Rp5.1@80.888,38.941
NetCr_2: Cr.2 J-TAG.7 Rr.1 RST.3 U1.25 | length 99.7
  Top Layer w0.18: v1(11.246,28.526) 13.394,28.526 v1(20.889,21.031) ; v1(27.913,6.733) 27.913,12.713 29.736,14.536 v1(29.858,14.536) 32.343,14.536 32.705,14.174 U1.25@34.304,14.174 ; v1(64.444,3.414) Rr.1@64.444,5.661 64.94,5.661 65.705,4.896 RST.3@67.135,4.896 67.135,3.701 68.016,2.82 Cr.2@70.102,2.82
  Bottom Layer w0.18: J-TAG.7@3.137,35.582 4.19,35.582 v1(11.246,28.526) ; v1(20.889,21.031) 23.363,21.031 v1(29.858,14.536) ; v1(27.913,6.733) 27.913,4.858 31.954,0.817 61.847,0.817 v1(64.444,3.414)
NetCu1_1: Cu1.1 USB.Shell@91.447,14.891 | length 5.1
  Top Layer w0.25: Cu1.1@88.071,12.509 90.245,12.509 91.447,13.711 USB.Shell@91.447,14.891
NetETH1_1: ETH1.1 Rt37.2 Rt45.2 VT13.2 | length 35.6
  Top Layer w0.25: Rt37.2@5.382,53.614 VT13.2@5.382,58.675 Rt45.2@5.382,60.935 ; Rt45.2@5.432,60.985 5.432,62.486 6.104,63.158 6.104,65.414 9.764,69.074 ETH1.1@9.764,87.502
NetETH1_2: ETH1.2 Rt38.2 Rt45.1 VT13.1 | length 34.1
  Top Layer w0.25: Rt45.1@7.232,60.985 7.232,62.454 6.504,63.182 6.504,65.248 10.181,68.925 10.181,84.09 10.784,84.693 ETH1.2@10.784,85.722 ; Rt38.2@7.282,53.614 VT13.1@7.282,58.675 Rt45.1@7.282,60.935
NetETH1_5: ETH1.5 Rt3.1 Rt18.2 VT2.2 | length 34.7
  Top Layer w0.25: Rt3.1@13.002,53.616 VT2.2@13.002,58.675 Rt18.2@13.002,60.987 ; Rt18.2@13.014,60.999 13.014,62.524 13.724,63.234 13.724,82.586 14.445,83.307 14.445,84.51 13.844,85.111 ETH1.5@13.844,87.502
NetETH1_6: ETH1.6 Rt4.1 Rt18.1 VT2.1 | length 32.6
  Top Layer w0.25: Rt18.1@14.814,60.999 14.814,62.545 14.124,63.235 14.124,82.42 14.864,83.16 ETH1.6@14.864,85.722 ; Rt4.1@14.902,53.616 VT2.1@14.902,58.675 Rt18.1@14.902,60.911
NetETH1_7: ETH1.7 Rt1.1 Rt17.2 VT1.2 | length 34.2
  Top Layer w0.25: ETH1.7@15.884,87.502 15.884,85.267 16.366,84.785 16.366,63.039 16.862,62.543 Rt17.2@16.862,60.999 ; Rt1.1@16.812,53.614 VT1.2@16.812,58.675 Rt17.2@16.812,60.949
NetETH1_8: ETH1.8 Rt2.1 Rt17.1 VT1.1 | length 32.8
  Top Layer w0.25: ETH1.8@16.904,85.722 16.904,64.005 18.662,62.247 Rt17.1@18.662,60.999 ; Rt2.1@18.712,53.614 VT1.1@18.712,58.675 Rt17.1@18.712,60.949
NetETH2_1: ETH2.1 Rt39.2 Rt46.2 VT14.2 | length 35.6
  Top Layer w0.25: Rt39.2@24.594,53.614 VT14.2@24.594,58.675 Rt46.2@24.594,60.949 ; Rt46.2@24.644,60.999 24.644,62.684 25.317,63.357 25.317,68.382 28.976,72.041 ETH2.1@28.976,87.502
NetETH2_2: ETH2.2 Rt40.2 Rt46.1 VT14.1 | length 34.1
  Top Layer w0.25: Rt46.1@26.444,60.999 26.444,62.692 25.735,63.401 25.735,68.234 29.376,71.876 29.376,83.819 29.996,84.439 ETH2.2@29.996,85.722 ; Rt40.2@26.494,53.614 VT14.1@26.494,58.675 Rt46.1@26.494,60.949
NetETH2_5: ETH2.5 Rt7.1 Rt20.2 VT4.2 | length 34.7
  Top Layer w0.25: Rt7.1@32.214,53.616 VT4.2@32.214,58.675 Rt20.2@32.214,60.949 ; Rt20.2@32.264,60.999 32.264,62.693 32.933,63.362 32.933,81.296 33.664,82.027 33.664,84.506 33.056,85.114 ETH2.5@33.056,87.502
NetETH2_6: ETH2.6 Rt8.1 Rt20.1 VT4.1 | length 32.7
  Top Layer w0.25: Rt20.1@34.064,60.999 34.064,62.663 33.333,63.394 33.333,81.13 34.076,81.874 ETH2.6@34.076,85.722 ; Rt8.1@34.114,53.616 VT4.1@34.114,58.675 Rt20.1@34.114,60.949
NetETH2_7: ETH2.7 Rt5.1 Rt19.2 VT3.2 | length 34.8
  Top Layer w0.25: ETH2.7@35.096,87.502 35.096,85.165 35.716,84.545 35.716,82.621 36.754,81.583 36.754,63.397 36.074,62.717 Rt19.2@36.074,60.999 ; Rt5.1@36.024,53.614 VT3.2@36.024,58.675 Rt19.2@36.024,60.949
NetETH2_8: ETH2.8 Rt6.1 Rt19.1 VT3.1 | length 32.8
  Top Layer w0.25: ETH2.8@36.116,85.722 36.116,82.787 37.154,81.749 37.154,63.403 37.874,62.683 Rt19.1@37.874,60.999 ; Rt6.1@37.924,53.614 VT3.1@37.924,58.675 Rt19.1@37.924,60.949
NetETH3_1: ETH3.1 Rt41.2 Rt47.2 VT15.2 | length 36.2
  Top Layer w0.25: Rt41.2@43.807,53.614 VT15.2@43.807,58.675 Rt47.2@43.807,60.949 ; Rt47.2@43.857,60.999 43.857,62.657 44.499,63.299 44.499,75.922 48.82,80.243 48.82,84.62 48.189,85.251 ETH3.1@48.189,87.502
NetETH3_2: ETH3.2 Rt42.2 Rt47.1 VT15.1 | length 34.2
  Top Layer w0.25: Rt47.1@45.657,60.999 45.657,62.626 44.913,63.37 44.913,75.738 49.22,80.045 49.22,85.711 ETH3.2@49.209,85.722 ; Rt42.2@45.707,53.614 VT15.1@45.707,58.675 Rt47.1@45.707,60.949
NetETH3_5: ETH3.5 Rt11.1 Rt22.2 VT6.2 | length 34.7
  Top Layer w0.25: Rt11.1@51.427,53.616 VT6.2@51.427,58.675 Rt22.2@51.427,60.949 ; Rt22.2@51.477,60.999 51.477,62.641 52.129,63.293 52.129,79.559 52.886,80.316 52.886,84.444 52.269,85.061 ETH3.5@52.269,87.502
NetETH3_6: ETH3.6 Rt12.1 Rt22.1 VT6.1 | length 32.7
  Top Layer w0.25: Rt22.1@53.277,60.999 53.277,62.604 52.529,63.352 52.529,79.393 53.289,80.153 ETH3.6@53.289,85.722 ; Rt12.1@53.327,53.616 VT6.1@53.327,58.675 Rt22.1@53.327,60.949